# Altium PCB POVRotor.PcbDoc (part 2 of 2)
Units mm, origin at the board's own origin, x right, y up, seen from the top; angles counter-clockwise.
Board outline 195 x 22.6 mm, 2 copper layers (Top Layer, Bottom Layer); 165 components, 228 nets, 837 pads, 84 vias.
Unrouted connection lines stored in the file: 1.
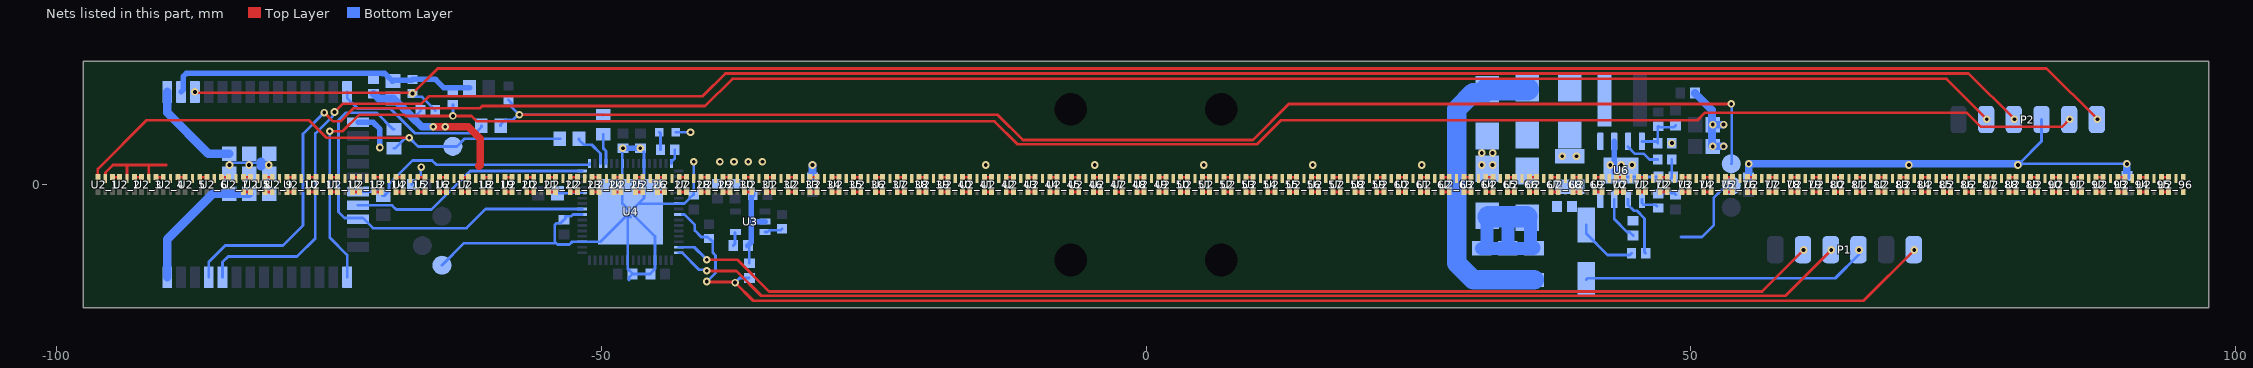
[diagram p2: the nets of this part, all layers, seen from the top]

## Via types
v1: diameter 0.7, hole 0.35, Top Layer to Bottom Layer, tented both sides, 84 vias

## Nets (pads, with @x,y where several pads share a name; then routed paths per layer and width w, separated by ;. In a path a pad name is that pad's centre, name@x,y a point inside that pad or via, vN(x,y) a via of type N, cw(c..) or ccw(c..) an arc to the next point about the centre after c; other vN are vias at no path point) (continued)
CI8: U2_7.3 U2_8.5 | length 0.7
  Top Layer w0.254: U2_7.3@-82.825,-0.675 U2_8.5@-82.175,-0.675
CI9: U2_8.3 U2_9.5 | length 0.6
  Top Layer w0.254: U2_8.3@-80.825,-0.675 U2_9.5@-80.175,-0.675
CI10: U2_9.3 U2_10.5 | length 0.6
  Top Layer w0.254: U2_9.3@-78.8,-0.7 -78.8,-0.675 U2_10.5@-78.175,-0.675
CI11: U2_10.3 U2_11.5 | length 0.6
  Top Layer w0.254: U2_10.3@-76.825,-0.675 U2_11.5@-76.175,-0.675
CI12: U2_11.3 U2_12.5 | length 0.6
  Top Layer w0.254: U2_11.3@-74.825,-0.675 U2_12.5@-74.175,-0.675
CI13: U2_12.3 U2_13.5 | length 0.6
  Top Layer w0.254: U2_12.3@-72.825,-0.675 U2_13.5@-72.175,-0.675
CI14: U2_13.3 U2_14.5 | length 0.6
  Top Layer w0.254: U2_13.3@-70.825,-0.675 U2_14.5@-70.175,-0.675
CI15: U2_14.3 U2_15.5 | length 0.6
  Top Layer w0.254: U2_14.3@-68.825,-0.675 U2_15.5@-68.175,-0.675
CI16: U2_15.3 U2_16.5 | length 0.6
  Top Layer w0.254: U2_15.3@-66.825,-0.675 U2_16.5@-66.175,-0.675
CI17: U2_16.3 U2_17.5 | length 0.6
  Top Layer w0.254: U2_16.3@-64.825,-0.675 U2_17.5@-64.175,-0.675
CI18: U2_17.3 U2_18.5 | length 0.6
  Top Layer w0.254: U2_17.3@-62.825,-0.675 U2_18.5@-62.175,-0.675
CI19: U2_18.3 U2_19.5 | length 0.6
  Top Layer w0.254: U2_18.3@-60.825,-0.675 U2_19.5@-60.175,-0.675
CI20: U2_19.3 U2_20.5 | length 0.6
  Top Layer w0.254: U2_19.3@-58.825,-0.675 U2_20.5@-58.175,-0.675
CI21: U2_20.3 U2_21.5 | length 0.6
  Top Layer w0.254: U2_20.3@-56.825,-0.675 U2_21.5@-56.175,-0.675
CI22: U2_21.3 U2_22.5 | length 0.6
  Top Layer w0.254: U2_21.3@-54.825,-0.675 U2_22.5@-54.175,-0.675
CI23: U2_22.3 U2_23.5 | length 0.6
  Top Layer w0.254: U2_22.3@-52.825,-0.675 U2_23.5@-52.175,-0.675
CI24: U2_23.3 U2_24.5 | length 0.6
  Top Layer w0.254: U2_23.3@-50.825,-0.675 U2_24.5@-50.175,-0.675
CI25: U2_24.3 U2_25.5 | length 0.6
  Top Layer w0.254: U2_24.3@-48.825,-0.675 U2_25.5@-48.175,-0.675
CI26: U2_25.3 U2_26.5 | length 0.6
  Top Layer w0.254: U2_25.3@-46.825,-0.675 U2_26.5@-46.175,-0.675
CI27: U2_26.3 U2_27.5 | length 0.6
  Top Layer w0.254: U2_26.3@-44.825,-0.675 U2_27.5@-44.175,-0.675
CI28: U2_27.3 U2_28.5 | length 0.6
  Top Layer w0.254: U2_27.3@-42.825,-0.675 U2_28.5@-42.175,-0.675
CI29: U2_28.3 U2_29.5 | length 0.6
  Top Layer w0.254: U2_28.3@-40.825,-0.675 U2_29.5@-40.175,-0.675
CI30: U2_29.3 U2_30.5 | length 0.6
  Top Layer w0.254: U2_29.3@-38.825,-0.675 U2_30.5@-38.175,-0.675
CI31: U2_30.3 U2_31.5 | length 0.6
  Top Layer w0.254: U2_30.3@-36.825,-0.675 U2_31.5@-36.175,-0.675
CI32: U2_31.3 U2_32.5 | length 0.6
  Top Layer w0.254: U2_31.3@-34.825,-0.675 U2_32.5@-34.175,-0.675
CI33: U2_32.3 U2_33.5 | length 0.6
  Top Layer w0.254: U2_32.3@-32.825,-0.675 U2_33.5@-32.175,-0.675
CI34: U2_33.3 U2_34.5 | length 0.6
  Top Layer w0.254: U2_33.3@-30.825,-0.675 U2_34.5@-30.175,-0.675
CI35: U2_34.3 U2_35.5 | length 0.6
  Top Layer w0.254: U2_34.3@-28.825,-0.675 U2_35.5@-28.175,-0.675
CI36: U2_35.3 U2_36.5 | length 0.6
  Top Layer w0.254: U2_35.3@-26.825,-0.675 U2_36.5@-26.175,-0.675
CI37: U2_36.3 U2_37.5 | length 0.6
  Top Layer w0.254: U2_36.3@-24.825,-0.675 U2_37.5@-24.175,-0.675
CI38: U2_37.3 U2_38.5 | length 0.6
  Top Layer w0.254: U2_37.3@-22.825,-0.675 U2_38.5@-22.175,-0.675
CI39: U2_38.3 U2_39.5 | length 0.6
  Top Layer w0.254: U2_38.3@-20.825,-0.675 U2_39.5@-20.175,-0.675
CI40: U2_39.3 U2_40.5 | length 0.6
  Top Layer w0.254: U2_39.3@-18.825,-0.675 U2_40.5@-18.175,-0.675
CI41: U2_40.3 U2_41.5 | length 0.6
  Top Layer w0.254: U2_40.3@-16.825,-0.675 U2_41.5@-16.175,-0.675
CI42: U2_41.3 U2_42.5 | length 0.6
  Top Layer w0.254: U2_41.3@-14.825,-0.675 U2_42.5@-14.175,-0.675
CI43: U2_42.3 U2_43.5 | length 0.6
  Top Layer w0.254: U2_42.3@-12.825,-0.675 U2_43.5@-12.175,-0.675
CI44: U2_43.3 U2_44.5 | length 0.6
  Top Layer w0.254: U2_43.3@-10.825,-0.675 U2_44.5@-10.175,-0.675
CI45: U2_44.3 U2_45.5 | length 0.6
  Top Layer w0.254: U2_44.3@-8.825,-0.675 U2_45.5@-8.175,-0.675
CI46: U2_45.3 U2_46.5 | length 0.6
  Top Layer w0.254: U2_45.3@-6.825,-0.675 U2_46.5@-6.175,-0.675
CI47: U2_46.3 U2_47.5 | length 0.6
  Top Layer w0.254: U2_46.3@-4.825,-0.675 U2_47.5@-4.175,-0.675
CI48: U2_47.3 U2_48.5 | length 0.6
  Top Layer w0.254: U2_47.3@-2.825,-0.675 U2_48.5@-2.175,-0.675
CI49: U2_48.3 U2_49.5 | length 0.6
  Top Layer w0.254: U2_48.3@-0.825,-0.675 U2_49.5@-0.175,-0.675
CI50: U2_49.3 U2_50.5 | length 0.6
  Top Layer w0.254: U2_49.3@1.175,-0.675 U2_50.5@1.825,-0.675
CI51: U2_50.3 U2_51.5 | length 0.6
  Top Layer w0.254: U2_50.3@3.175,-0.675 U2_51.5@3.825,-0.675
CI52: U2_51.3 U2_52.5 | length 0.6
  Top Layer w0.254: U2_51.3@5.175,-0.675 U2_52.5@5.825,-0.675
CI53: U2_52.3 U2_53.5 | length 0.6
  Top Layer w0.254: U2_52.3@7.175,-0.675 U2_53.5@7.825,-0.675
CI54: U2_53.3 U2_54.5 | length 0.6
  Top Layer w0.254: U2_53.3@9.175,-0.675 U2_54.5@9.825,-0.675
CI55: U2_54.3 U2_55.5 | length 0.7
  Top Layer w0.254: U2_54.3@11.175,-0.675 U2_55.5@11.825,-0.675
CI56: U2_55.3 U2_56.5 | length 0.6
  Top Layer w0.254: U2_55.3@13.175,-0.675 U2_56.5@13.825,-0.675
CI57: U2_56.3 U2_57.5 | length 0.6
  Top Layer w0.254: U2_56.3@15.175,-0.675 U2_57.5@15.825,-0.675
CI58: U2_57.3 U2_58.5 | length 0.6
  Top Layer w0.254: U2_57.3@17.175,-0.675 U2_58.5@17.825,-0.675
CI59: U2_58.3 U2_59.5 | length 0.6
  Top Layer w0.254: U2_58.3@19.175,-0.675 U2_59.5@19.825,-0.675
CI60: U2_59.3 U2_60.5 | length 0.6
  Top Layer w0.254: U2_59.3@21.175,-0.675 U2_60.5@21.825,-0.675
CI61: U2_60.3 U2_61.5 | length 0.6
  Top Layer w0.254: U2_60.3@23.175,-0.675 U2_61.5@23.825,-0.675
CI62: U2_61.3 U2_62.5 | length 0.6
  Top Layer w0.254: U2_61.3@25.175,-0.675 U2_62.5@25.825,-0.675
CI63: U2_62.3 U2_63.5 | length 0.6
  Top Layer w0.254: U2_62.3@27.175,-0.675 U2_63.5@27.825,-0.675
CI64: U2_63.3 U2_64.5 | length 0.6
  Top Layer w0.254: U2_63.3@29.175,-0.675 U2_64.5@29.825,-0.675
CI65: U2_64.3 U2_65.5 | length 0.6
  Top Layer w0.254: U2_64.3@31.175,-0.675 U2_65.5@31.825,-0.675
CI66: U2_65.3 U2_66.5 | length 0.6
  Top Layer w0.254: U2_65.3@33.175,-0.675 U2_66.5@33.825,-0.675
CI67: U2_66.3 U2_67.5 | length 0.6
  Top Layer w0.254: U2_66.3@35.175,-0.675 U2_67.5@35.825,-0.675
CI68: U2_67.3 U2_68.5 | length 0.6
  Top Layer w0.254: U2_67.3@37.175,-0.675 U2_68.5@37.825,-0.675
CI69: U2_68.3 U2_69.5 | length 0.6
  Top Layer w0.254: U2_68.3@39.175,-0.675 U2_69.5@39.825,-0.675
CI70: U2_69.3 U2_70.5 | length 0.6
  Top Layer w0.254: U2_69.3@41.175,-0.675 U2_70.5@41.825,-0.675
CI71: U2_70.3 U2_71.5 | length 0.6
  Top Layer w0.254: U2_70.3@43.175,-0.675 U2_71.5@43.825,-0.675
CI72: U2_71.3 U2_72.5 | length 0.6
  Top Layer w0.254: U2_71.3@45.175,-0.675 U2_72.5@45.825,-0.675
CI73: U2_72.3 U2_73.5 | length 0.6
  Top Layer w0.254: U2_72.3@47.175,-0.675 U2_73.5@47.825,-0.675
CI74: U2_73.3 U2_74.5 | length 0.6
  Top Layer w0.254: U2_73.3@49.175,-0.675 U2_74.5@49.825,-0.675
CI75: U2_74.3 U2_75.5 | length 0.6
  Top Layer w0.254: U2_74.3@51.175,-0.675 U2_75.5@51.825,-0.675
CI76: U2_75.3 U2_76.5 | length 0.6
  Top Layer w0.254: U2_75.3@53.175,-0.675 U2_76.5@53.825,-0.675
CI77: U2_76.3 U2_77.5 | length 0.6
  Top Layer w0.254: U2_76.3@55.175,-0.675 U2_77.5@55.825,-0.675
CI78: U2_77.3 U2_78.5 | length 0.6
  Top Layer w0.254: U2_77.3@57.175,-0.675 U2_78.5@57.825,-0.675
CI79: U2_78.3 U2_79.5 | length 0.6
  Top Layer w0.254: U2_78.3@59.175,-0.675 U2_79.5@59.825,-0.675
CI80: U2_79.3 U2_80.5 | length 0.6
  Top Layer w0.254: U2_79.3@61.175,-0.675 U2_80.5@61.825,-0.675
CI81: U2_80.3 U2_81.5 | length 0.6
  Top Layer w0.254: U2_80.3@63.175,-0.675 U2_81.5@63.825,-0.675
CI82: U2_81.3 U2_82.5 | length 0.6
  Top Layer w0.254: U2_81.3@65.175,-0.675 U2_82.5@65.825,-0.675
CI83: U2_82.3 U2_83.5 | length 0.6
  Top Layer w0.254: U2_82.3@67.175,-0.675 U2_83.5@67.825,-0.675
CI84: U2_83.3 U2_84.5 | length 0.6
  Top Layer w0.254: U2_83.3@69.175,-0.675 U2_84.5@69.825,-0.675
CI85: U2_84.3 U2_85.5 | length 0.6
  Top Layer w0.254: U2_84.3@71.175,-0.675 U2_85.5@71.825,-0.675
CI86: U2_85.3 U2_86.5 | length 0.6
  Top Layer w0.254: U2_85.3@73.175,-0.675 U2_86.5@73.825,-0.675
CI87: U2_86.3 U2_87.5 | length 0.6
  Top Layer w0.254: U2_86.3@75.175,-0.675 U2_87.5@75.825,-0.675
CI88: U2_87.3 U2_88.5 | length 0.6
  Top Layer w0.254: U2_87.3@77.175,-0.675 U2_88.5@77.825,-0.675
CI89: U2_88.3 U2_89.5 | length 0.7
  Top Layer w0.254: U2_88.3@79.175,-0.675 U2_89.5@79.825,-0.675
CI90: U2_89.3 U2_90.5 | length 0.7
  Top Layer w0.254: U2_89.3@81.175,-0.675 U2_90.5@81.825,-0.675
CI91: U2_90.3 U2_91.5 | length 0.6
  Top Layer w0.254: U2_90.3@83.175,-0.675 U2_91.5@83.825,-0.675
CI92: U2_91.3 U2_92.5 | length 0.7
  Top Layer w0.254: U2_91.3@85.175,-0.675 U2_92.5@85.825,-0.675
CI93: U2_92.3 U2_93.5 | length 0.7
  Top Layer w0.254: U2_92.3@87.175,-0.675 U2_93.5@87.825,-0.675
CI94: U2_93.3 U2_94.5 | length 0.6
  Top Layer w0.254: U2_93.3@89.175,-0.675 U2_94.5@89.825,-0.675
CI95: U2_94.3 U2_95.5 | length 0.7
  Top Layer w0.254: U2_94.3@91.175,-0.675 U2_95.5@91.825,-0.675
CI96: U2_95.3 U2_96.5 | length 0.6
  Top Layer w0.254: U2_95.3@93.175,-0.675 U2_96.5@93.825,-0.675
CO96: U2_96.3
COIL_N: C8.1 C26.1 C27.1 D4.1 D5.2 | length 17.4
  Bottom Layer w0.254: C27.1@31.2,-6.1 31.3,-6 C27.1@31.3,-5.85 ; D4.1@35,-3.05 D4.1@35.3,-3.35 ; C8.1@35.3,-5.9 C8.1@35.3,-5.85
  Bottom Layer w1.2: C27.1@30.8,-5.85 C27.1@31.3,-5.85 ; D5.2@31.3,-2.85 C27.1@31.3,-5.85 ; 33.2,-3 C26.1@33.2,-5.85 ; D4.1@35.3,-3.35 C8.1@35.3,-5.85 ; C8.1@35.6,-5.8 35.55,-5.85 C8.1@35.3,-5.85 ; C27.1@31.3,-5.85 C26.1@33.2,-5.85 ; C26.1@33.2,-5.85 C8.1@35.3,-5.85
  Bottom Layer w2: D5.2@31.405,-2.955 D4.1@34.905,-2.955
COIL_P: C8.2 C26.2 C27.2 D2.1 D3.2 | length 29.2
  Bottom Layer w0.254: D2.1@35,8.75 D2.1@35,8.8
  Bottom Layer w1.8: D3.2@31.3,8.75 31.3,8.6 31.125,8.425 30.025,8.425 28.5,6.9 28.5,-7.2 30.05,-8.75 C26.2@33.2,-8.75 C8.2@35.6,-8.75
  Bottom Layer w2.1: D3.2@31.3,8.75 D2.1@35,8.75
COMP: R7.1 U6.3 | length 3.2
  Bottom Layer w0.254: U6.3@44.2,3.475 44.854,2.821 45.679,2.821 46.2,2.3 R7.1@46.95,2.3
DEBUG_LED: R10.1 U4.64 | length 1.5
  Bottom Layer w0.254: U4.64@-43.55,1.935 -43.55,2.235 -43.547,2.238 -43.399,2.238 -43.25,2.387 R10.1@-43.25,3.2
DI1: JU4.1 JU5.1 TP2.1 U2_1.6 | length 48.1
  Top Layer w0.254: U2_1.6@-96.175,0.675 -96.175,1.425 -91.7,5.9 -76.8,5.9 -75.2,4.3 v1(-67.6,4.3)
  Bottom Layer w0.254: JU4.1@-69,3.325 -68.9,3.325 -68.01,4.215 -67.685,4.215 v1(-67.6,4.3) -66.8,3.5 -63.224,3.5 -62.524,4.2 JU5.1@-53.775,4.2
DI2: U2_1.2 U2_2.6 | length 0.6
  Top Layer w0.254: U2_1.2@-94.8,0.7 -94.775,0.675 U2_2.6@-94.175,0.675
DI3: U2_2.2 U2_3.6 | length 0.7
  Top Layer w0.254: U2_2.2@-92.8,0.6 -92.8,0.602 -92.727,0.675 U2_3.6@-92.175,0.675
DI4: U2_3.2 U2_4.6 | length 0.6
  Top Layer w0.254: U2_3.2@-90.825,0.675 U2_4.6@-90.175,0.675
DI5: U2_4.2 U2_5.6 | length 0.7
  Top Layer w0.254: U2_4.2@-88.825,0.675 U2_5.6@-88.175,0.675
DI6: U2_5.2 U2_6.6 | length 0.7
  Top Layer w0.254: U2_5.2@-86.825,0.675 U2_6.6@-86.175,0.675
DI7: U2_6.2 U2_7.6 | length 0.7
  Top Layer w0.254: U2_6.2@-84.825,0.675 -84.2,0.675 U2_7.6@-84.2,0.7
DI8: U2_7.2 U2_8.6 | length 0.7
  Top Layer w0.254: U2_7.2@-82.825,0.675 U2_8.6@-82.175,0.675
DI9: U2_8.2 U2_9.6 | length 0.6
  Top Layer w0.254: U2_8.2@-80.825,0.675 U2_9.6@-80.175,0.675
DI10: U2_9.2 U2_10.6 | length 0.6
  Top Layer w0.254: U2_9.2@-78.8,0.7 -78.8,0.675 U2_10.6@-78.175,0.675
DI11: U2_10.2 U2_11.6 | length 0.6
  Top Layer w0.254: U2_10.2@-76.825,0.675 U2_11.6@-76.175,0.675
DI12: U2_11.2 U2_12.6 | length 0.6
  Top Layer w0.254: U2_11.2@-74.825,0.675 U2_12.6@-74.175,0.675
DI13: U2_12.2 U2_13.6 | length 0.6
  Top Layer w0.254: U2_12.2@-72.825,0.675 U2_13.6@-72.175,0.675
DI14: U2_13.2 U2_14.6 | length 0.6
  Top Layer w0.254: U2_13.2@-70.825,0.675 U2_14.6@-70.175,0.675
DI15: U2_14.2 U2_15.6 | length 0.6
  Top Layer w0.254: U2_14.2@-68.825,0.675 U2_15.6@-68.175,0.675
DI16: U2_15.2 U2_16.6 | length 0.6
  Top Layer w0.254: U2_15.2@-66.825,0.675 U2_16.6@-66.175,0.675
DI17: U2_16.2 U2_17.6 | length 0.6
  Top Layer w0.254: U2_16.2@-64.825,0.675 U2_17.6@-64.175,0.675
DI18: U2_17.2 U2_18.6 | length 0.6
  Top Layer w0.254: U2_17.2@-62.825,0.675 U2_18.6@-62.175,0.675
DI19: U2_18.2 U2_19.6 | length 0.6
  Top Layer w0.254: U2_18.2@-60.825,0.675 U2_19.6@-60.175,0.675
DI20: U2_19.2 U2_20.6 | length 0.6
  Top Layer w0.254: U2_19.2@-58.825,0.675 U2_20.6@-58.175,0.675
DI21: U2_20.2 U2_21.6 | length 0.6
  Top Layer w0.254: U2_20.2@-56.825,0.675 U2_21.6@-56.175,0.675
DI22: U2_21.2 U2_22.6 | length 0.6
  Top Layer w0.254: U2_21.2@-54.825,0.675 U2_22.6@-54.175,0.675
DI23: U2_22.2 U2_23.6 | length 0.6
  Top Layer w0.254: U2_22.2@-52.825,0.675 U2_23.6@-52.175,0.675
DI24: U2_23.2 U2_24.6 | length 0.6
  Top Layer w0.254: U2_23.2@-50.825,0.675 U2_24.6@-50.175,0.675
DI25: U2_24.2 U2_25.6 | length 0.6
  Top Layer w0.254: U2_24.2@-48.825,0.675 U2_25.6@-48.175,0.675
DI26: U2_25.2 U2_26.6 | length 0.6
  Top Layer w0.254: U2_25.2@-46.825,0.675 U2_26.6@-46.175,0.675
DI27: U2_26.2 U2_27.6 | length 0.6
  Top Layer w0.254: U2_26.2@-44.825,0.675 U2_27.6@-44.175,0.675
DI28: U2_27.2 U2_28.6 | length 0.6
  Top Layer w0.254: U2_27.2@-42.825,0.675 U2_28.6@-42.175,0.675
DI29: U2_28.2 U2_29.6 | length 0.6
  Top Layer w0.254: U2_28.2@-40.825,0.675 U2_29.6@-40.175,0.675
DI30: U2_29.2 U2_30.6 | length 0.6
  Top Layer w0.254: U2_29.2@-38.825,0.675 U2_30.6@-38.175,0.675
DI31: U2_30.2 U2_31.6 | length 0.6
  Top Layer w0.254: U2_30.2@-36.825,0.675 U2_31.6@-36.175,0.675
DI32: U2_31.2 U2_32.6 | length 0.6
  Top Layer w0.254: U2_31.2@-34.825,0.675 U2_32.6@-34.175,0.675
DI33: U2_32.2 U2_33.6 | length 0.6
  Top Layer w0.254: U2_32.2@-32.825,0.675 U2_33.6@-32.175,0.675
DI34: U2_33.2 U2_34.6 | length 0.6
  Top Layer w0.254: U2_33.2@-30.825,0.675 U2_34.6@-30.175,0.675
DI35: U2_34.2 U2_35.6 | length 0.6
  Top Layer w0.254: U2_34.2@-28.825,0.675 U2_35.6@-28.175,0.675
DI36: U2_35.2 U2_36.6 | length 0.6
  Top Layer w0.254: U2_35.2@-26.825,0.675 U2_36.6@-26.175,0.675
DI37: U2_36.2 U2_37.6 | length 0.6
  Top Layer w0.254: U2_36.2@-24.825,0.675 U2_37.6@-24.175,0.675
DI38: U2_37.2 U2_38.6 | length 0.6
  Top Layer w0.254: U2_37.2@-22.825,0.675 U2_38.6@-22.175,0.675
DI39: U2_38.2 U2_39.6 | length 0.6
  Top Layer w0.254: U2_38.2@-20.825,0.675 U2_39.6@-20.175,0.675
DI40: U2_39.2 U2_40.6 | length 0.6
  Top Layer w0.254: U2_39.2@-18.825,0.675 U2_40.6@-18.175,0.675
DI41: U2_40.2 U2_41.6 | length 0.6
  Top Layer w0.254: U2_40.2@-16.825,0.675 U2_41.6@-16.175,0.675
DI42: U2_41.2 U2_42.6 | length 0.6
  Top Layer w0.254: U2_41.2@-14.825,0.675 U2_42.6@-14.175,0.675
DI43: U2_42.2 U2_43.6 | length 0.6
  Top Layer w0.254: U2_42.2@-12.825,0.675 U2_43.6@-12.175,0.675
DI44: U2_43.2 U2_44.6 | length 0.6
  Top Layer w0.254: U2_43.2@-10.825,0.675 U2_44.6@-10.175,0.675
DI45: U2_44.2 U2_45.6 | length 0.6
  Top Layer w0.254: U2_44.2@-8.825,0.675 U2_45.6@-8.175,0.675
DI46: U2_45.2 U2_46.6 | length 0.6
  Top Layer w0.254: U2_45.2@-6.825,0.675 U2_46.6@-6.175,0.675
DI47: U2_46.2 U2_47.6 | length 0.6
  Top Layer w0.254: U2_46.2@-4.825,0.675 U2_47.6@-4.175,0.675
DI48: U2_47.2 U2_48.6 | length 0.6
  Top Layer w0.254: U2_47.2@-2.825,0.675 U2_48.6@-2.175,0.675
DI49: U2_48.2 U2_49.6 | length 0.6
  Top Layer w0.254: U2_48.2@-0.825,0.675 U2_49.6@-0.175,0.675
DI50: U2_49.2 U2_50.6 | length 0.6
  Top Layer w0.254: U2_49.2@1.175,0.675 U2_50.6@1.825,0.675
DI51: U2_50.2 U2_51.6 | length 0.6
  Top Layer w0.254: U2_50.2@3.175,0.675 U2_51.6@3.825,0.675
DI52: U2_51.2 U2_52.6 | length 0.6
  Top Layer w0.254: U2_51.2@5.175,0.675 U2_52.6@5.825,0.675
DI53: U2_52.2 U2_53.6 | length 0.6
  Top Layer w0.254: U2_52.2@7.175,0.675 U2_53.6@7.825,0.675
DI54: U2_53.2 U2_54.6 | length 0.6
  Top Layer w0.254: U2_53.2@9.175,0.675 U2_54.6@9.825,0.675
DI55: U2_54.2 U2_55.6 | length 0.7
  Top Layer w0.254: U2_54.2@11.175,0.675 U2_55.6@11.825,0.675
DI56: U2_55.2 U2_56.6 | length 0.6
  Top Layer w0.254: U2_55.2@13.175,0.675 U2_56.6@13.825,0.675
DI57: U2_56.2 U2_57.6 | length 0.6
  Top Layer w0.254: U2_56.2@15.175,0.675 U2_57.6@15.825,0.675
DI58: U2_57.2 U2_58.6 | length 0.6
  Top Layer w0.254: U2_57.2@17.175,0.675 U2_58.6@17.825,0.675
DI59: U2_58.2 U2_59.6 | length 0.6
  Top Layer w0.254: U2_58.2@19.175,0.675 U2_59.6@19.825,0.675
DI60: U2_59.2 U2_60.6 | length 0.6
  Top Layer w0.254: U2_59.2@21.175,0.675 U2_60.6@21.825,0.675
DI61: U2_60.2 U2_61.6 | length 0.6
  Top Layer w0.254: U2_60.2@23.175,0.675 U2_61.6@23.825,0.675
DI62: U2_61.2 U2_62.6 | length 0.6
  Top Layer w0.254: U2_61.2@25.175,0.675 U2_62.6@25.825,0.675
DI63: U2_62.2 U2_63.6 | length 0.6
  Top Layer w0.254: U2_62.2@27.175,0.675 U2_63.6@27.825,0.675
DI64: U2_63.2 U2_64.6 | length 0.6
  Top Layer w0.254: U2_63.2@29.175,0.675 U2_64.6@29.825,0.675
DI65: U2_64.2 U2_65.6 | length 0.6
  Top Layer w0.254: U2_64.2@31.175,0.675 U2_65.6@31.825,0.675
DI66: U2_65.2 U2_66.6 | length 0.6
  Top Layer w0.254: U2_65.2@33.175,0.675 U2_66.6@33.825,0.675
DI67: U2_66.2 U2_67.6 | length 0.6
  Top Layer w0.254: U2_66.2@35.175,0.675 U2_67.6@35.825,0.675
DI68: U2_67.2 U2_68.6 | length 0.6
  Top Layer w0.254: U2_67.2@37.175,0.675 U2_68.6@37.825,0.675
DI69: U2_68.2 U2_69.6 | length 0.6
  Top Layer w0.254: U2_68.2@39.175,0.675 U2_69.6@39.825,0.675
DI70: U2_69.2 U2_70.6 | length 0.6
  Top Layer w0.254: U2_69.2@41.175,0.675 U2_70.6@41.825,0.675
DI71: U2_70.2 U2_71.6 | length 0.6
  Top Layer w0.254: U2_70.2@43.175,0.675 U2_71.6@43.825,0.675
DI72: U2_71.2 U2_72.6 | length 0.6
  Top Layer w0.254: U2_71.2@45.175,0.675 U2_72.6@45.825,0.675
DI73: U2_72.2 U2_73.6 | length 0.6
  Top Layer w0.254: U2_72.2@47.175,0.675 U2_73.6@47.825,0.675
DI74: U2_73.2 U2_74.6 | length 0.6
  Top Layer w0.254: U2_73.2@49.175,0.675 U2_74.6@49.825,0.675
DI75: U2_74.2 U2_75.6 | length 0.6
  Top Layer w0.254: U2_74.2@51.175,0.675 U2_75.6@51.825,0.675
DI76: U2_75.2 U2_76.6 | length 0.6
  Top Layer w0.254: U2_75.2@53.175,0.675 U2_76.6@53.825,0.675
DI77: U2_76.2 U2_77.6 | length 0.6
  Top Layer w0.254: U2_76.2@55.175,0.675 U2_77.6@55.825,0.675
DI78: U2_77.2 U2_78.6 | length 0.6
  Top Layer w0.254: U2_77.2@57.175,0.675 U2_78.6@57.825,0.675
DI79: U2_78.2 U2_79.6 | length 0.6
  Top Layer w0.254: U2_78.2@59.175,0.675 U2_79.6@59.825,0.675
DI80: U2_79.2 U2_80.6 | length 0.6
  Top Layer w0.254: U2_79.2@61.175,0.675 U2_80.6@61.825,0.675
DI81: U2_80.2 U2_81.6 | length 0.6
  Top Layer w0.254: U2_80.2@63.175,0.675 U2_81.6@63.825,0.675
DI82: U2_81.2 U2_82.6 | length 0.6
  Top Layer w0.254: U2_81.2@65.175,0.675 U2_82.6@65.825,0.675
DI83: U2_82.2 U2_83.6 | length 0.6
  Top Layer w0.254: U2_82.2@67.175,0.675 U2_83.6@67.825,0.675
DI84: U2_83.2 U2_84.6 | length 0.6
  Top Layer w0.254: U2_83.2@69.175,0.675 U2_84.6@69.825,0.675
DI85: U2_84.2 U2_85.6 | length 0.6
  Top Layer w0.254: U2_84.2@71.175,0.675 U2_85.6@71.825,0.675
DI86: U2_85.2 U2_86.6 | length 0.6
  Top Layer w0.254: U2_85.2@73.175,0.675 U2_86.6@73.825,0.675
DI87: U2_86.2 U2_87.6 | length 0.6
  Top Layer w0.254: U2_86.2@75.175,0.675 U2_87.6@75.825,0.675
DI88: U2_87.2 U2_88.6 | length 0.6
  Top Layer w0.254: U2_87.2@77.175,0.675 U2_88.6@77.825,0.675
DI89: U2_88.2 U2_89.6 | length 0.7
  Top Layer w0.254: U2_88.2@79.175,0.675 U2_89.6@79.825,0.675
DI90: U2_89.2 U2_90.6 | length 0.7
  Top Layer w0.254: U2_89.2@81.175,0.675 U2_90.6@81.825,0.675
DI91: U2_90.2 U2_91.6 | length 0.6
  Top Layer w0.254: U2_90.2@83.175,0.675 U2_91.6@83.825,0.675
DI92: U2_91.2 U2_92.6 | length 0.7
  Top Layer w0.254: U2_91.2@85.175,0.675 U2_92.6@85.825,0.675
DI93: U2_92.2 U2_93.6 | length 0.7
  Top Layer w0.254: U2_92.2@87.175,0.675 U2_93.6@87.825,0.675
DI94: U2_93.2 U2_94.6 | length 0.6
  Top Layer w0.254: U2_93.2@89.175,0.675 U2_94.6@89.825,0.675
DI95: U2_94.2 U2_95.6 | length 0.7
  Top Layer w0.254: U2_94.2@91.175,0.675 U2_95.6@91.825,0.675
DI96: U2_95.2 U2_96.6 | length 0.6
  Top Layer w0.254: U2_95.2@93.175,0.675 U2_96.6@93.825,0.675
DO96: U2_96.2
EN: C25.1 P2.1 R15.1 U5.3 | length 180.3
  Top Layer w0.254: v1(-87.27,8.5) -87.195,8.425 -67.375,8.425 v1(-67.3,8.35) -64.989,10.661 82.639,10.661 v1(87.3,6)
  Bottom Layer w0.254: v1(-67.3,8.35) -67.002,8.052 -66.427,8.052 -65.225,6.85 C25.1@-65.225,6.8 ; P2.1@87.25,5.97 87.27,5.97 v1(87.3,6)
ESP32_3V: C23.1 C24.2 JU1.1 R5.1 R15.2 U5.2 | length 28.5
  Bottom Layer w0.512: U5.2@-88.54,8.5 -88.346,8.694 -88.346,9.9 -88.046,10.2 -70.044,10.2 -70.038,10.194 -69.844,10.194 -69.544,9.894 -69.15,9.5 C24.2@-69.1,9.5 -69.025,9.575 -67.375,9.575 R15.2@-67.3,9.65 -65.197,9.65 -64.447,8.9 JU1.1@-62.075,8.9
ESP_HALL: JU7.2 U5.14 | length 14.6
  Bottom Layer w0.254: U5.14@-73.3,8.5 -73.3,7.95 -72.304,6.954 -69.308,6.954 -67.054,4.7 -61.575,4.7 -60.975,5.3 JU7.2@-60.975,5.4
ESP_SCK: JU2.2 U4.49 U5.20 | length 23.4
  Bottom Layer w0.254: U5.20@-72.3,-0.635 -70.39,-0.635 JU2.2@-70,-1.025 -69.9,-1.025 -69.452,-0.577 -69.452,0.064 -67.316,2.2 -65.5,2.2 -65.127,1.827 -51.053,1.827 -51.05,1.83 U4.49@-51.05,1.935
ESP_SDI: U4.48 U5.21 | length 22.2
  Bottom Layer w0.254: U5.21@-72.3,-1.905 -69.188,-1.905 -68.793,-2.3 -65.558,-2.3 -62.008,1.25 U4.48@-51.735,1.25
ESP_SDO: JU4.2 U4.41 U5.22 | length 38.1
  Bottom Layer w0.254: JU4.2@-69,5.075 -69.1,5.075 -70.625,6.6 -73.4,6.6 -74.1,5.9 -74.1,-2.5 -73.532,-3.068 -71.857,-3.068 -70.923,-4.002 -62.356,-4.002 -60.605,-2.25 U4.41@-51.735,-2.25
FB: C2.2 R2.1 R6.2 U6.4 | length 4.7
  Bottom Layer w0.254: U6.4@45.505,3.955 46.845,3.955 R6.2@46.9,3.9 ; R6.2@46.95,3.8 46.95,3.955 46.95,5.3 R2.1@47,5.35 47.1,5.25 48.425,5.25 C2.2@48.6,5.425
GND: C3.1 C4.1 C5.2 C6.2 C7.1 C9.2 C10.2 C11.2 C12.1 C13.2 C14.2 C15.2 C16.2 C17.2 C18.2 C19.2 C20.2 C21.2 C22.2 C23.2 C24.1 C25.2 C28.2 C29.2 C30.1 C34.2 D1.1 D3.1 D5.1 D6.2 P1.4 P2.3 R4.2 R6.1 TP4.1 TP6.1 U2_1.1 U2_2.1 U2_3.1 U2_4.1 U2_5.1 U2_6.1 U2_7.1 U2_8.1 U2_9.1 U2_10.1 U2_11.1 U2_12.1 U2_13.1 U2_14.1 U2_15.1 U2_16.1 U2_17.1 U2_18.1 U2_19.1 U2_20.1 U2_21.1 U2_22.1 U2_23.1 U2_24.1 U2_25.1 U2_26.1 U2_27.1 U2_28.1 U2_29.1 U2_30.1 U2_31.1 U2_32.1 U2_33.1 U2_34.1 U2_35.1 U2_36.1 U2_37.1 U2_38.1 U2_39.1 U2_40.1 U2_41.1 U2_42.1 U2_43.1 U2_44.1 U2_45.1 U2_46.1 U2_47.1 U2_48.1 U2_49.1 U2_50.1 U2_51.1 U2_52.1 U2_53.1 U2_54.1 U2_55.1 U2_56.1 U2_57.1 U2_58.1 U2_59.1 U2_60.1 U2_61.1 U2_62.1 U2_63.1 U2_64.1 U2_65.1 U2_66.1 U2_67.1 U2_68.1 U2_69.1 U2_70.1 U2_71.1 U2_72.1 U2_73.1 U2_74.1 U2_75.1 U2_76.1 U2_77.1 U2_78.1 U2_79.1 U2_80.1 U2_81.1 U2_82.1 U2_83.1 U2_84.1 U2_85.1 U2_86.1 U2_87.1 U2_88.1 U2_89.1 U2_90.1 U2_91.1 U2_92.1 U2_93.1 U2_94.1 U2_95.1 U2_96.1 U3.2 U4.7 U4.20 U4.25 U4.35 U4.40 U4.55 U4.59 U4.65 U5.1 U5.15 U5.38 U5.39 U6.2 U6.9 | length 223.1
  Top Layer w0.254: U2_1.1@-95.5,0.55 -95.485,0.565 -95.485,1.115 -94.8,1.8 -93.5,1.8 ; U2_2.1@-93.5,0.55 -93.5,1.8 ; U2_3.1@-91.5,0.55 -91.5,1.7 -91.6,1.8 ; -89.9,1.8 -91.6,1.8 ; -93.5,1.8 -91.6,1.8
  Top Layer w0.7: v1(-65.4,5.3) v1(-64.3,5.3) -62.2,5.3 -61.1,4.2 -61.1,1.8 -61.2,1.7
  Bottom Layer w0.254: v1@-84,1.9 -84.1,2 -81.2,2 v1@-80.5,2 ; C5.2@-67.375,0 -67.375,0.05 -66.556,0.869 -66.556,1.544 v1(-66.5,1.6) ; -67.35,6.2 -67.125,6.2 -66.575,6.75 C25.2@-66.575,6.8 ; TP4.1@-64.6,-7.4 -62.576,-5.376 -54.248,-5.376 ; U4.40@-51.735,-2.75 -52.575,-2.75 -52.727,-2.902 -53.277,-2.902 -53.277,-3.102 C16.2@-53.4,-3.225 -53.723,-3.548 -54.099,-3.548 -54.248,-3.697 -54.248,-5.252 -54,-5.5 -52.9,-5.5 -52.65,-5.25 U4.35@-51.735,-5.25 -50.05,-5.25 U4.65@-47.55,-2.75 ; C19.2@-47.9,3.3 -48.05,3.15 U4.55@-48.05,1.935 -48.05,-1.75 U4.65@-47.3,-2.5 ; -47.448,-8.748 -47.448,-8.523 C20.2@-47.125,-8.2 ; U4.65@-47.3,-3 U4.65@-47.55,-2.75 ; v1(-46.4,3.325) -46.373,3.325 -46.05,3.002 U4.59@-46.05,1.935 -46.05,-1.25 U4.65@-46.55,-1.75 ; D6.2@-43.15,4.8 v1(-41.8,4.8) ; C17.2@-41.573,-0.948 -41.873,-1.248 -41.873,-1.261 -42.359,-1.747 -42.862,-1.747 U4.7@-42.865,-1.75 U4.65@-46.55,-1.75 ; C17.2@-41.5,-0.925 v1(-41.5,2.1) ; C29.2@-36.525,-5.6 -36.4,-5.725 C22.2@-36.4,-7.225 ; C13.2@40.4,-8.7 40.5,-8.6 63.24,-8.6 65.42,-6.42 v1(65.42,-6) ; U6.9@42.965,1.135 U6.9@43.1,1 ; U6.2@42.965,3.955 U6.2@43.011,4.001 ; U6.9@43.8,0.6 43.9,0.7 C28.2@47.025,0.7 ; R4.2@47,-0.85 R4.2@47,-0.8 ; C28.2@47,0.6 R4.2@47,-0.8 ; R6.1@48.35,3.8 R6.1@48.35,3.95 ; C10.2@48.6,-0.925 48.475,-0.8 R4.2@47,-0.8 ; 49.1,-4.8 51,-4.8 52.1,-3.7 52.1,-1.2 52.816,-0.484 52.911,-0.484 53.295,-0.1 TP6.1@53.7,-0.1 ; v1@52.9,5.5 v1@53,5.4 ; v1@55.2,1.9 v1(55.3,1.9) ; v1@80.1,1.8 v1@80.1,1.9 ; P2.3@82.17,5.97 82.17,3.97 v1@80.1,1.9 ; v1(90,1.9) v1@80.1,1.9 ; U4.65@-47.55,-2.75 U4.25@-47.55,-6.935 -47.55,-7.725 -47.125,-8.15 C20.2@-47.125,-8.2 ; U4.65@-47.55,-2.75 U4.65@-47.3,-2.5 ; U4.65@-47.3,-2.5 U4.65@-46.55,-1.75 ; U4.65@-47.3,-2.5 -45.05,-4.75 U4.20@-45.05,-6.935 -45.05,-7.725 -45.475,-8.15 C21.2@-45.475,-8.2 C20.2@-47.125,-8.2
  Bottom Layer w0.512: U5.15@-72.3,5.715 -70.915,5.715 -70.3,5.1 v1(-70.3,3.4) ; v1(-48,3.325) v1(-46.4,3.325) ; C29.2@-36.525,-5.6 -36.202,-5.277 -36.202,-1.027 C7.1@-36.075,-0.9 ; -36.2,-3.4 U3.2@-34.95,-3.4 ; U6.9@42.965,1.135 U6.2@42.965,3.955
  Bottom Layer w0.7: C23.2@-70.9,8.325 -70.85,8.325 -70.425,7.9 C24.1@-69.1,7.9 -69.05,7.9 -67.35,6.2 -66.45,5.3 v1(-65.4,5.3) v1(-64.3,5.3) ; C9.2@-30.6,0.675 v1(-30.6,1.8) ; C3.1@50.375,8.4 50.375,8.35 50.475,8.25 50.525,8.25 51.935,6.84 C30.1@51.935,5.565 ; v1@52.9,5.5 v1(52,5.5) C30.1@51.935,5.565 ; v1(53,3.5) v1(52,3.5) 51.935,3.565 C30.1@51.935,5.565 ; C14.2@55.3,0.675 v1(55.3,1.9) v1@80.1,1.9 ; C15.2@90,0.775 v1(90,1.9)
  Bottom Layer w0.8: U5.38@-89.81,-8.5 -89.81,-5.01 -85.635,-0.835 U5.39@-84.135,-0.835 U5.39@-82.3,-0.835 ; U5.1@-89.81,8.5 -89.81,6.61 -86.035,2.835 U5.39@-84.135,2.835 ; -81.2,1.7 -81.2,2 -81.2,2.101
  other v1: -84.1,1.8 -82.3,1.8 -80.5,1.8 -14.7,1.8 -4.7,1.8 5.3,1.8 15.3,1.8 25.3,1.8 30.8,1.8 31.8,1.8 42.6,1.8 43.6,1.8 44.6,1.8 70,1.8 80,1.8 -39.1,2.1 -37.8,2.1 -36.5,2.1 -35.2,2.1 38.2,2.6 39.5,2.6 30.8,2.9 31.8,2.9 48.25,3.8 53,5.5
HALL_OUT: JU6.1 JU7.1 R9.1 TP7.1 | length 130.7
  Top Layer w0.254: v1(-57.5,6.4) -13.6,6.4 -11.3,4.1 9.8,4.1 13.1,7.4 v1(53.7,7.4)
  Bottom Layer w0.254: JU7.1@-59.225,5.4 -59.225,5.5 -58.777,5.948 -58.073,5.948 -57.621,6.4 v1(-57.5,6.4) ; R9.1@-58.5,7.75 -58.21,7.46 -58.21,7.11 v1(-57.5,6.4) ; JU6.1@-49.8,6.375 -49.825,6.4 v1(-57.5,6.4) ; TP7.1@53.7,1.9 53.75,1.95 53.75,7.35 v1(53.7,7.4)
IO_0: P2.2 R5.2 U5.25 | length 178.5
  Top Layer w0.254: v1(-74.9,4.9) -73.7,4.9 -72.2,6.4 -68.053,6.4 -67.953,6.3 v1(-63.6,6.3) -61.9,6.3 -61.4,5.8 -13.9,5.8 -11.8,3.7 10.2,3.7 12.4,5.9 50.6,5.9 51.3,6.6 75.3,6.6 76.6,5.3 84.06,5.3 v1(84.76,6)
  Bottom Layer w0.254: v1(-74.9,4.9) -74.9,-4.86 -73.3,-6.46 U5.25@-73.3,-8.5 ; v1(-63.6,6.3) R5.2@-63.6,7.35
MCLR: C22.1 P1.6 R1.1 U4.9 | length 123
  Top Layer w0.254: v1(-40.3,-8.9) -40.25,-8.95 -37.75,-8.95 v1(-37.7,-9) -36.039,-10.661 65.839,-10.661 v1(70.5,-6)
  Bottom Layer w0.254: U4.9@-42.562,-2.753 -42.347,-2.753 -41.4,-3.7 -41.4,-4.215 -40.807,-4.808 -40.242,-4.808 R1.1@-40.1,-4.95 ; v1@-40.2,-8.9 -40.2,-8.8 -39.5,-8.1 -39.5,-6.5 -39.752,-6.248 -39.752,-5.248 R1.1@-39.983,-5.017 ; v1(-37.7,-9) -37.275,-8.575 C22.1@-36.4,-8.575
NetC1_1: C1.1 U6.7 | length 4.2
  Bottom Layer w0.254: U6.7@42.965,-1.355 42.965,-3.165 44.152,-4.352 44.377,-4.352 C1.1@44.7,-4.675
NetC28_1: C28.1 R7.2 | length 1.7
  Bottom Layer w0.254: C28.1@48.2,0.6 48.25,0.65 R7.2@48.25,2.3
NetC29_1: C29.1 U3.4 | length 1.3
  Bottom Layer w0.254: C29.1@-37.875,-5.6 -37.705,-5.43 -37.705,-4.405 U3.4@-37.7,-4.4
NetD6_1: D6.1 R10.2 | length 1.6
  Bottom Layer w0.254: D6.1@-44.65,4.8 -44.55,4.7 R10.2@-44.55,3.2
NetJU3_2: JU3.2 U4.44 | length 2.3
  Bottom Layer w0.254: JU3.2@-54,-0.8 -52.82,-0.8 -52.77,-0.75 U4.44@-51.735,-0.75
NetJU5_2: JU5.2 U4.51 | length 3.5
  Bottom Layer w0.254: JU5.2@-52.025,4.2 -52.025,4.1 -51.577,3.652 -50.852,3.652 -50.053,2.853 -50.053,1.938 U4.51@-50.05,1.935
NetJU6_2: JU6.2 U4.52 | length 2.8
  Bottom Layer w0.254: JU6.2@-49.8,4.625 -49.8,3.331 -49.55,3.081 U4.52@-49.55,1.935
NetR3_1: R3.1 U6.6 | length 5.8
  Bottom Layer w0.254: U6.6@44.235,-1.355 44.235,-1.87 44.772,-2.407 45.053,-2.407 45.752,-3.106 45.752,-6.202 R3.1@45.85,-6.3
NetR8_1: R8.1 U3.3 | length 1.7
  Bottom Layer w0.254: U3.3@-34.95,-4.35 -34.725,-4.35 -34.577,-4.202 -34.43,-4.202 -34.428,-4.2 -33.55,-4.2 R8.1@-33.4,-4.05
PGC: P1.2 U4.15 | length 106.5
  Top Layer w0.254: v1(-40.3,-6.9) -37.5,-6.9 -34.6,-9.8 56.54,-9.8 60.3,-6.04 v1@60.3,-6
  Bottom Layer w0.254: U4.15@-42.865,-5.75 -41.45,-5.75 -40.4,-6.8 v1@-40.4,-6.9 ; P1.2@60.29,-5.97 60.32,-6 v1(60.34,-6)
PGD: P1.3 U4.16 | length 109.3
  Top Layer w0.254: v1(-40.3,-7.9) -40.269,-7.931 -37.569,-7.931 -35.3,-10.2 58.68,-10.2 v1(62.88,-6)
  Bottom Layer w0.254: U4.16@-42.865,-6.25 -42.565,-6.25 -41,-7.815 -40.285,-7.815 v1@-40.2,-7.9 ; P1.3@62.83,-5.97 62.85,-5.97 v1(62.88,-6)
RT: R4.1 U6.5 | length 1.9
  Bottom Layer w0.254: U6.5@45.505,-1.355 45.505,-1.689 45.668,-1.852 46.752,-1.852 R4.1@46.9,-2
SW: C1.2 D1.2 L1.1 U6.1
U0RX: P2.4 U5.34 | length 180.5
  Top Layer w0.254: v1(-74.458,6.658) -73.695,7.422 -66.478,7.422 -65.8,8.1 -40.7,8.1 -38.6,10.2 75.48,10.2 v1(79.68,6)
  Bottom Layer w0.254: U5.34@-84.73,-8.5 -84.73,-7.119 -84.211,-6.6 -77.9,-6.6 -76.222,-4.922 -76.222,4.678 -74.613,6.287 -74.613,6.383 -74.458,6.538 v1(-74.458,6.658) ; P2.4@79.63,5.97 79.65,5.97 v1(79.68,6)
U0TX: P2.5 U5.35 | length 178.7
  Top Layer w0.254: v1(-75.4,6.6) -74.6,5.8 -73.9,5.8 -72.7,7 -61.101,7 -60.901,7.2 -40.458,7.2 -37.958,9.7 73.44,9.7 v1(77.14,6)
  Bottom Layer w0.254: U5.35@-86,-8.5 -86,-7.119 -84.481,-5.6 -79.2,-5.6 -77.343,-3.743 -77.343,4.657 v1(-75.4,6.6) ; P2.5@77.09,5.97 77.11,5.97 v1(77.14,6)
VCOIL: C6.1 C13.1 C34.1 D2.2 D4.2 R3.2 U6.8 | length 5.8
  Bottom Layer w0.254: C13.1@40.4,-3.7 40.4,-4.5 42.352,-6.452 44.398,-6.452 R3.2@44.55,-6.3
pads on no net: P1.1 P2.6 U4.1 U4.2 U4.3 U4.4 U4.5 U4.6 U4.10 U4.11 U4.12 U4.13 U4.14 U4.17 U4.18 U4.21 U4.22 U4.23 U4.24 U4.27 U4.28 U4.29 U4.30 U4.31 U4.32 U4.33 U4.36 U4.37 U4.38 U4.42 U4.43 U4.45 U4.46 U4.47 U4.53 U4.56 U4.57 U4.58 U4.61 U4.62 U4.63 U5.4 U5.5 U5.6 U5.7 U5.8 U5.9 U5.10 U5.11 U5.12 U5.13 U5.16 U5.17 U5.18 U5.23 U5.24 U5.26 U5.27 U5.28 U5.29 U5.30 U5.31 U5.32 U5.33 U5.36 U5.37

## Polygon pours and split planes (outlines as drawn)
5V on Top Layer "LED_5V" (solid, pour order 42): 94.7,-0.4 94.7,-3.2 92.4,-5.5 -88.7,-5.5 -90.4,-3.8 -90.4,-0.4
GND on Top Layer "LED_GND" (solid, pour order 43): -90.4,0.4 -90.4,3.2 -88.1,5.5 92.4,5.5 94.7,3.2 94.7,0.4
5V on Top Layer "PolygonDirect" (solid, pour order 47): -44.5,-4.7 -44.5,-2.1 -48.25,-2.1 -48.25,-2.75 -46.3,-4.7
GND on Top Layer "PolygonDirect" (solid, pour order 62): -56.3,3.1 -53.7,3.1 -53.7,2.1 -56.3,2.1
GND on Top Layer "PolygonDirect" (solid, pour order 48): -45.3,4.1 -45.3,1.4 -39.6,1.4 -39.6,4.1
GND on Bottom Layer "PolygonDirect" (solid, pour order 69): -39.8,-0.4 -39.8,2.7 -34.5,2.7 -34.5,-1.4 -36.5,-1.4 -37.5,-0.4
5V on Bottom Layer "PolygonDirect" (solid, pour order 68): -35.5,-2.8 -35.5,-0.6 -35.1,-0.2 -30.1,-0.2 -30.1,-2.2 -31.2,-3.3 -33.9,-3.3 -34.4,-2.8
GND on Bottom Layer "PolygonDirect" (solid, pour order 67): 30.1,5.7 35.7,11.3 44.9,11.3 50.7,5.5 50.7,-4.4 45.5,-9.6 38.2,-9.6 30.1,-1.5
VCOIL on Bottom Layer "PolygonDirect" (solid, pour order 63): 33.9,5.8 33.9,0 36.6,0 37.3,-0.7 38.5,-1.9 38.5,-2.5 39.3,-3.3 39.3,-5.3 39.7,-5.7 41.4,-5.7 42.3,-4.8 42.3,-0.7 40.4,1.2 37.7,1.2 36.2,2.7 36.2,5.8
5V on Bottom Layer "PolygonDirect" (solid, pour order 64): 44.6,5.2 46.4,3.4 46.4,-3.3 47.2,-4.1 50.6,-4.1 51.6,-3.1 51.6,6.4 47.9,10.1 44.6,10.1
SW on Bottom Layer "PolygonDirect" (solid, pour order 65): 37.8,10.1 42.8,10.1 42.8,2.8 41.3,2.8 40.7,3.4 40.7,5.4 40,6.1 38.1,6.1 37.8,6.4

## Silkscreen, mask and mechanical layers (free items; w line width, h text height)
Bottom Overlay:
  circle w0.712: c70.464,5.258 r0.3
  circle w0.712: c87.3,-5.2 r0.3
  lines w0.254: -26.982,-11.293 cw(c0,0) -26.982,11.293 ; -8.924,4.513 ccw(c0,0) -8.909,-4.542 ccw(c-6.915,-6.915) -4.542,-8.909 ; -8.909,4.542 cw(c-6.915,6.915) -4.542,8.909 cw(c0,0) 4.513,8.924 ; -4.513,-8.924 ccw(c0,0) 4.542,-8.909 ; 4.542,8.909 cw(c6.915,6.915) 8.909,4.542 cw(c0,0) 8.924,-4.513 cw(c6.898,-6.859) 4.563,-8.898 ; 26.982,-11.293 ccw(c0,0) 26.982,11.293
  text "JLCJLCJLCJLC" at 86.9,10.4 h0.8 r180
  text "J" at -50.15,8.25 h0.7 r180
  text "J" at -61.427,7.707 h0.7 r180
  text "J" at -53.25,6.05 h0.7 r180
  text "PIC32MZ" at 60.5,6 h1 r180
  text "J" at -60.343,4.18 h0.7 r180
  text "DI" at -65.769,3.852 h0.7 r180
  text "OUT" at 49.556,2.441 h1 r180
  text "J" at -69.186,2.331 h0.7 r180
  text "GND" at 49.507,0.645 h1 r180
  text "5V" at 50.3,-1.5 h1 r180
  text "J" at -55.15,-2.05 h0.7 r180
  text "CI" at -66.741,-2.637 h0.7 r180
  text "J" at -70.186,-3.769 h0.7 r180
  text "5V" at -68.822,-5.184 h0.7 r180
  text "ESP32" at 86.2,-5.8 h1
  text "GND" at -67.672,-7.141 h0.7 r180
Board Shape:
  the board outline again, w0.254